# Altium PCB QSTL_RFSW_LED.PcbDoc
Units mm, origin at the board's own origin, x right, y up, seen from the top; angles counter-clockwise.
Board outline 36 x 48 mm, 4 copper layers (Top Layer, L2, L3, Bottom Layer), stack 0.603 mm thick; 9 components, 25 nets, 79 pads, 100 vias.
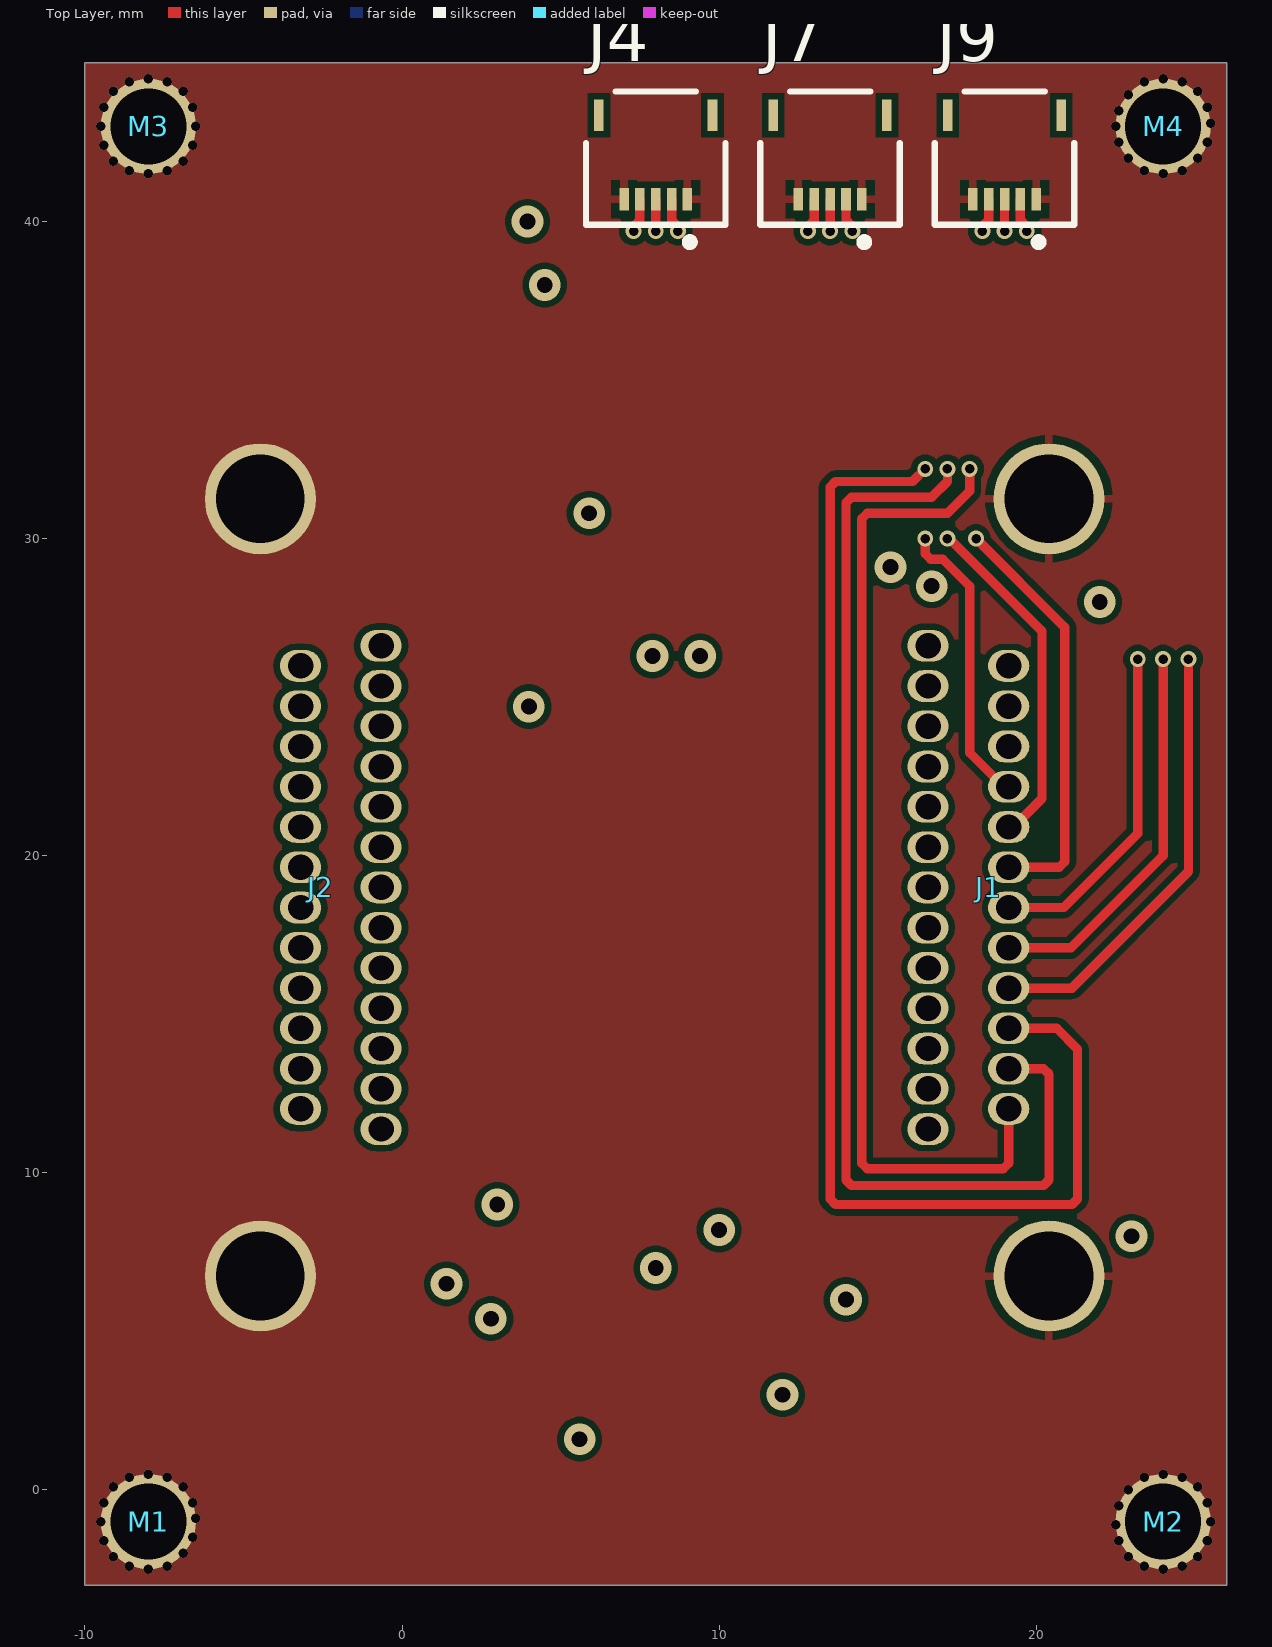
[diagram p0: Top Layer view]
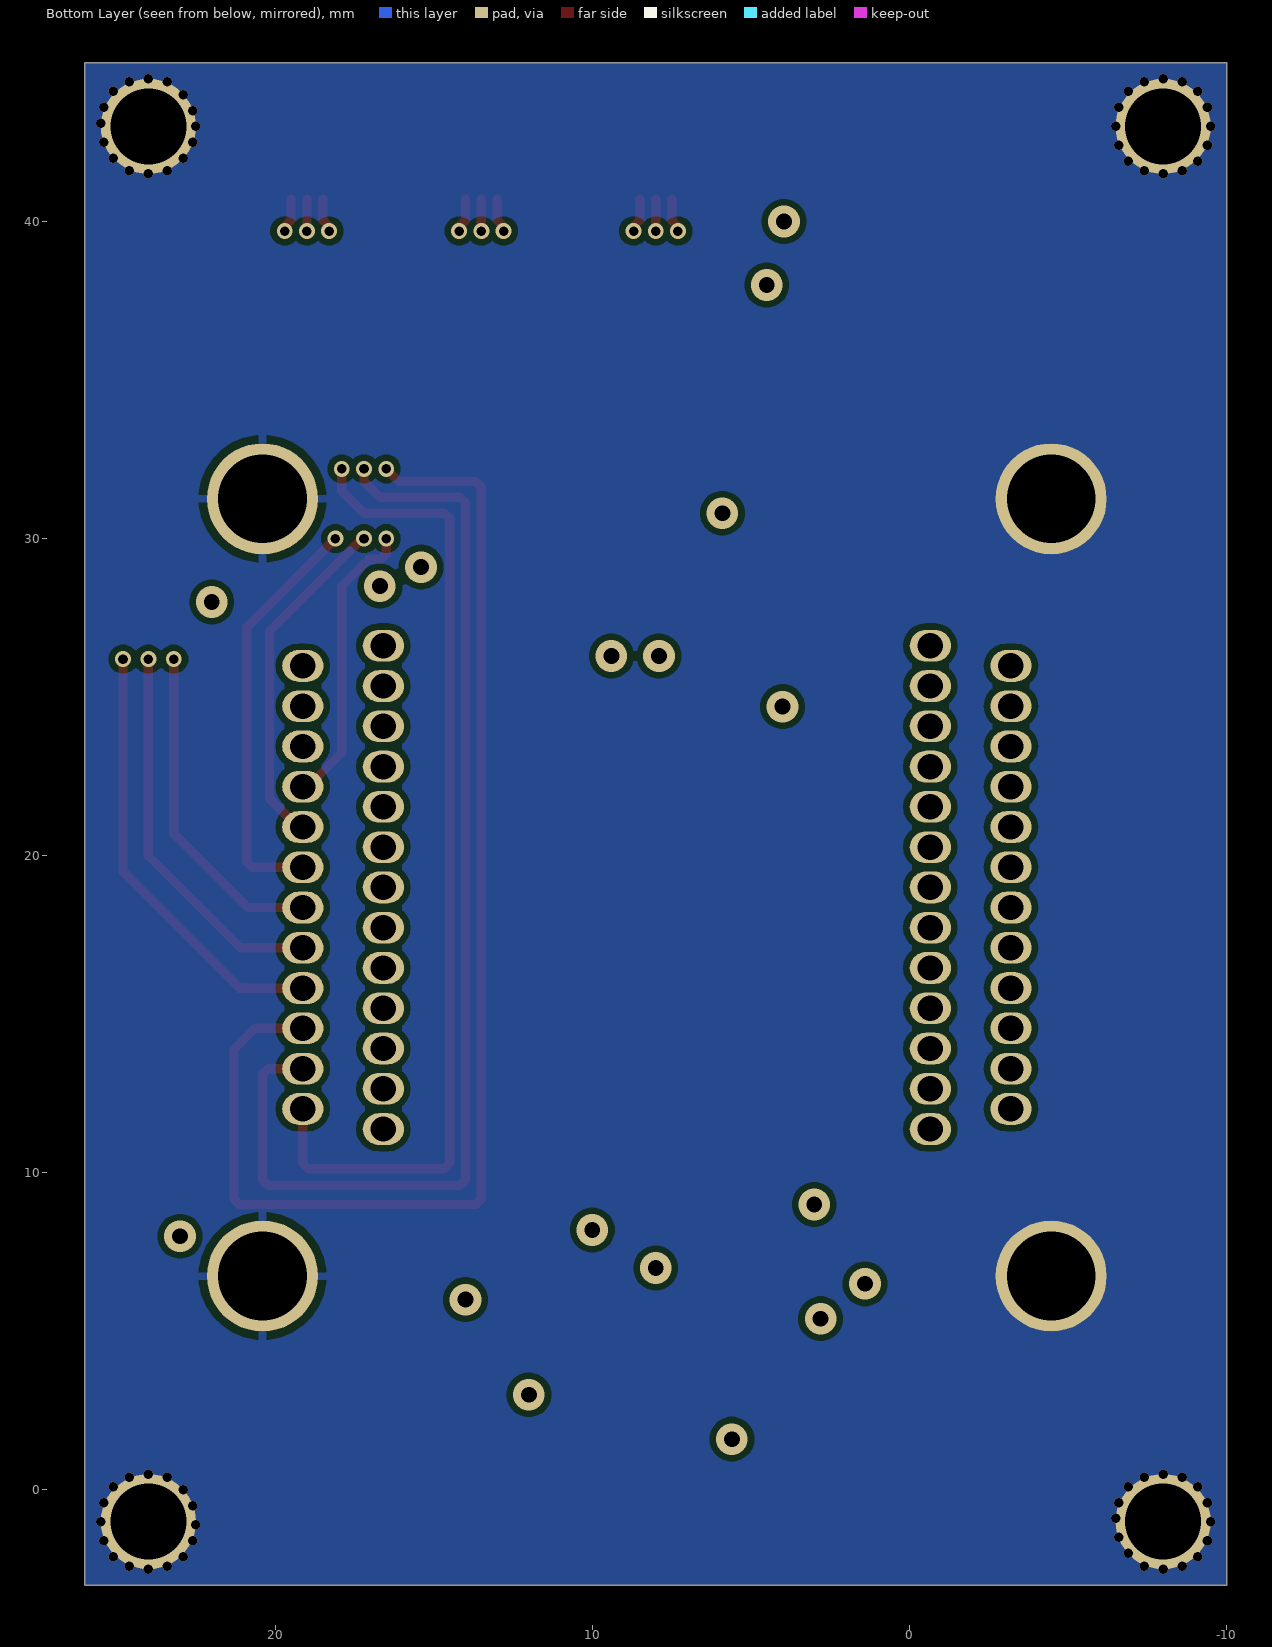
[diagram p1: Bottom Layer view, seen from below]
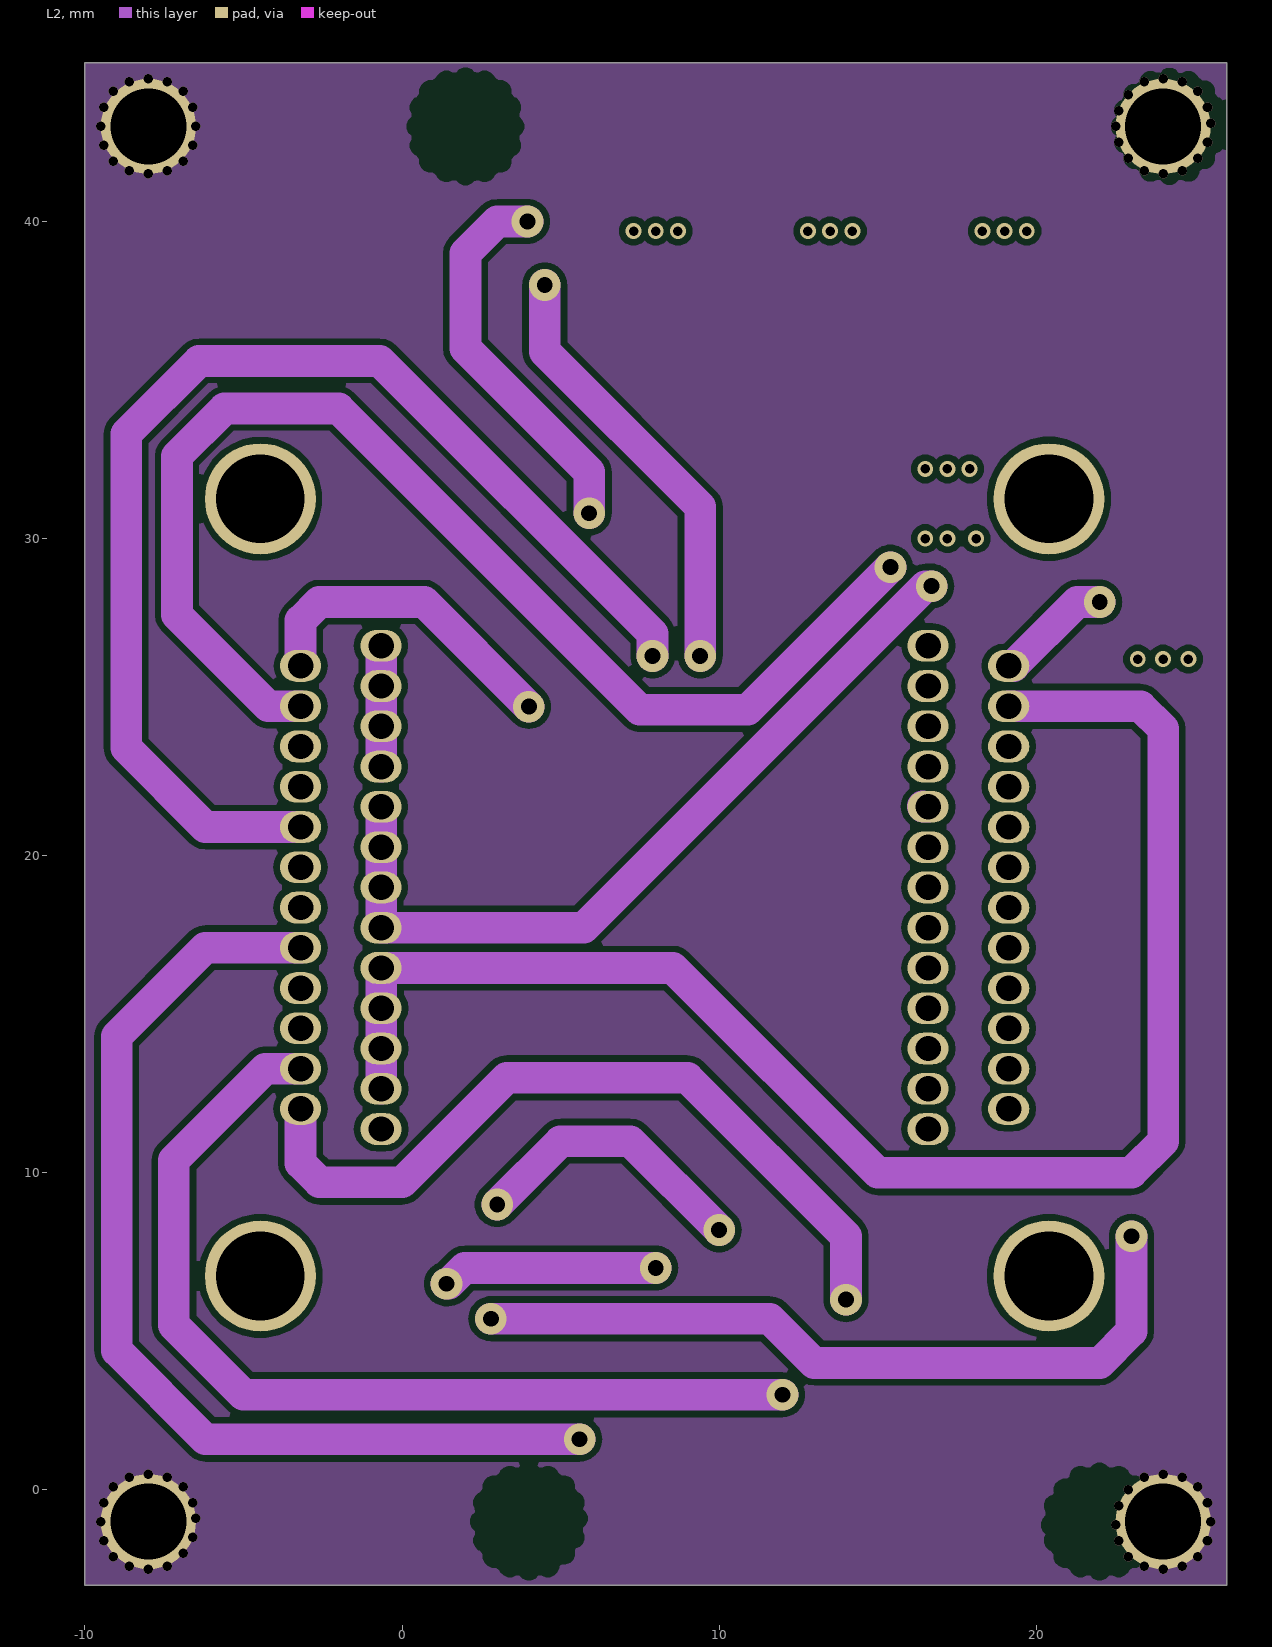
[diagram p2: L2]
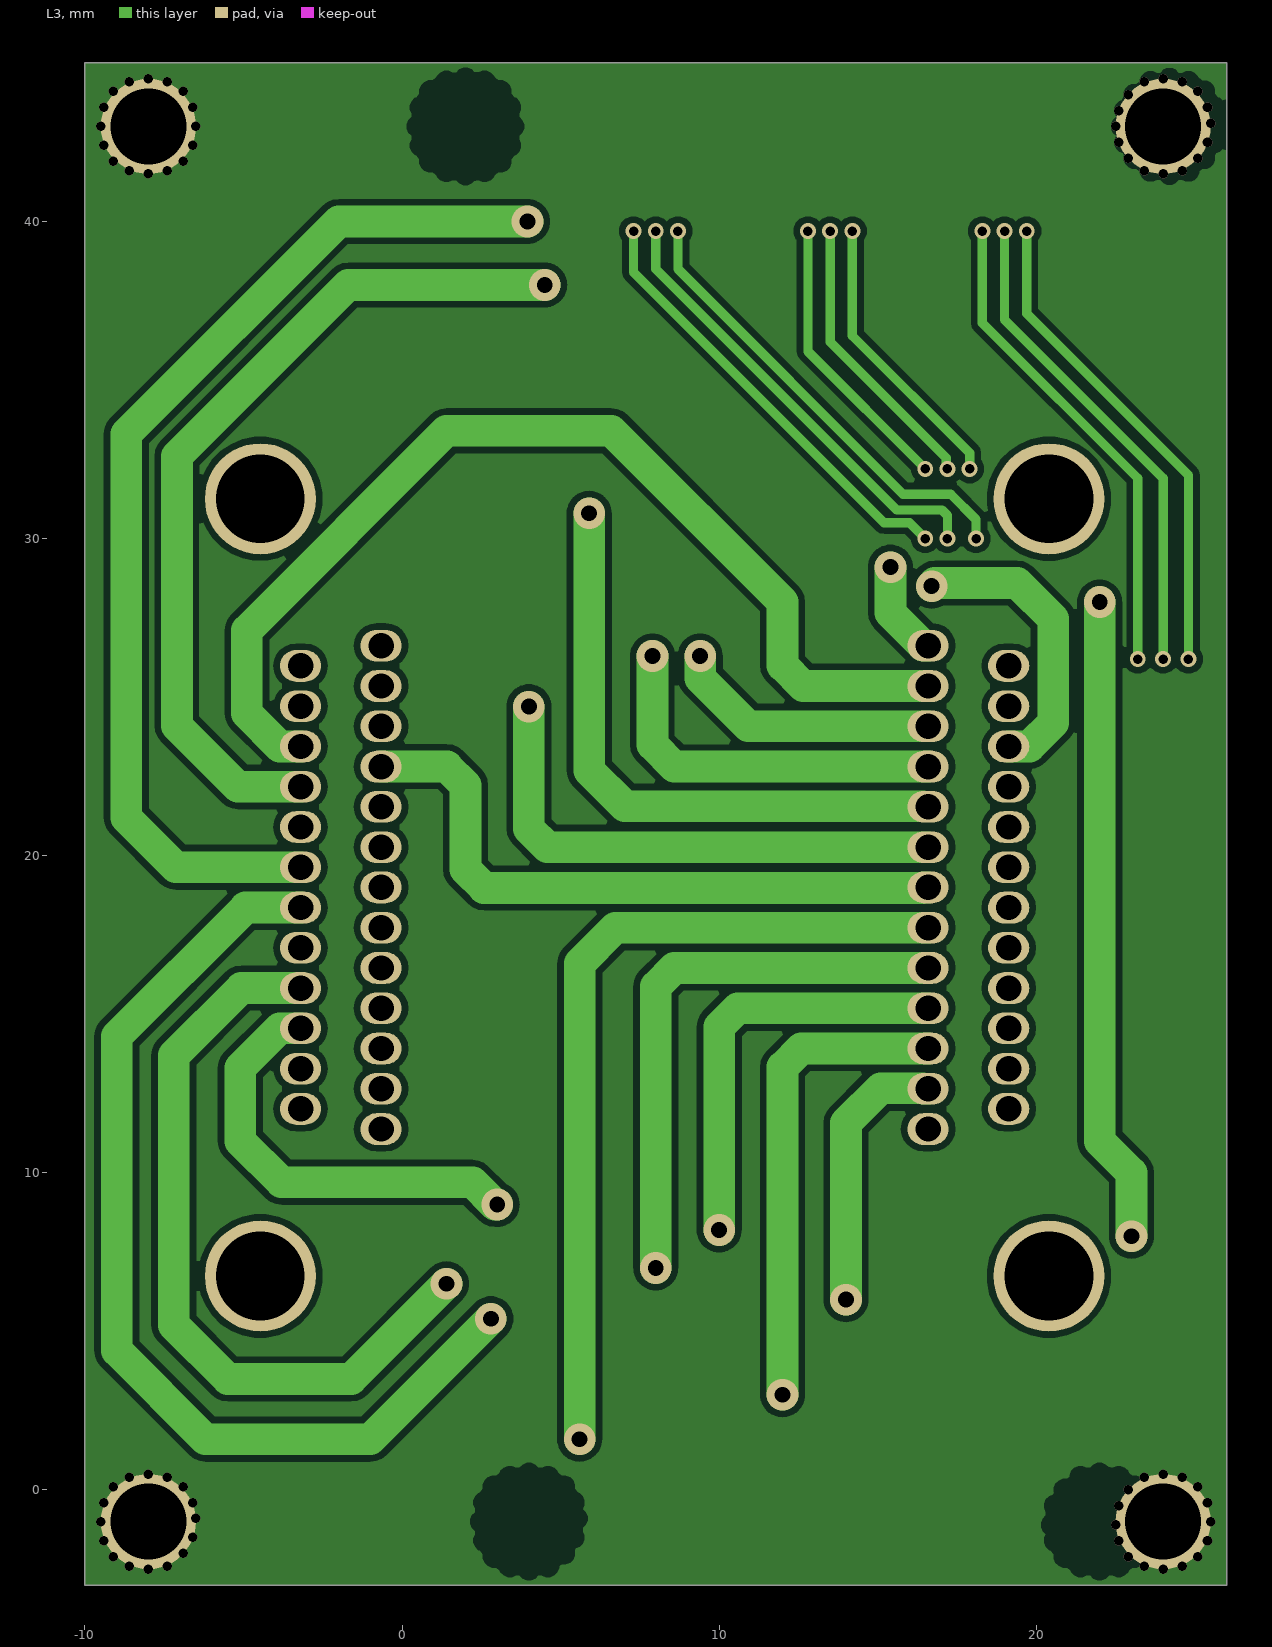
[diagram p3: L3]
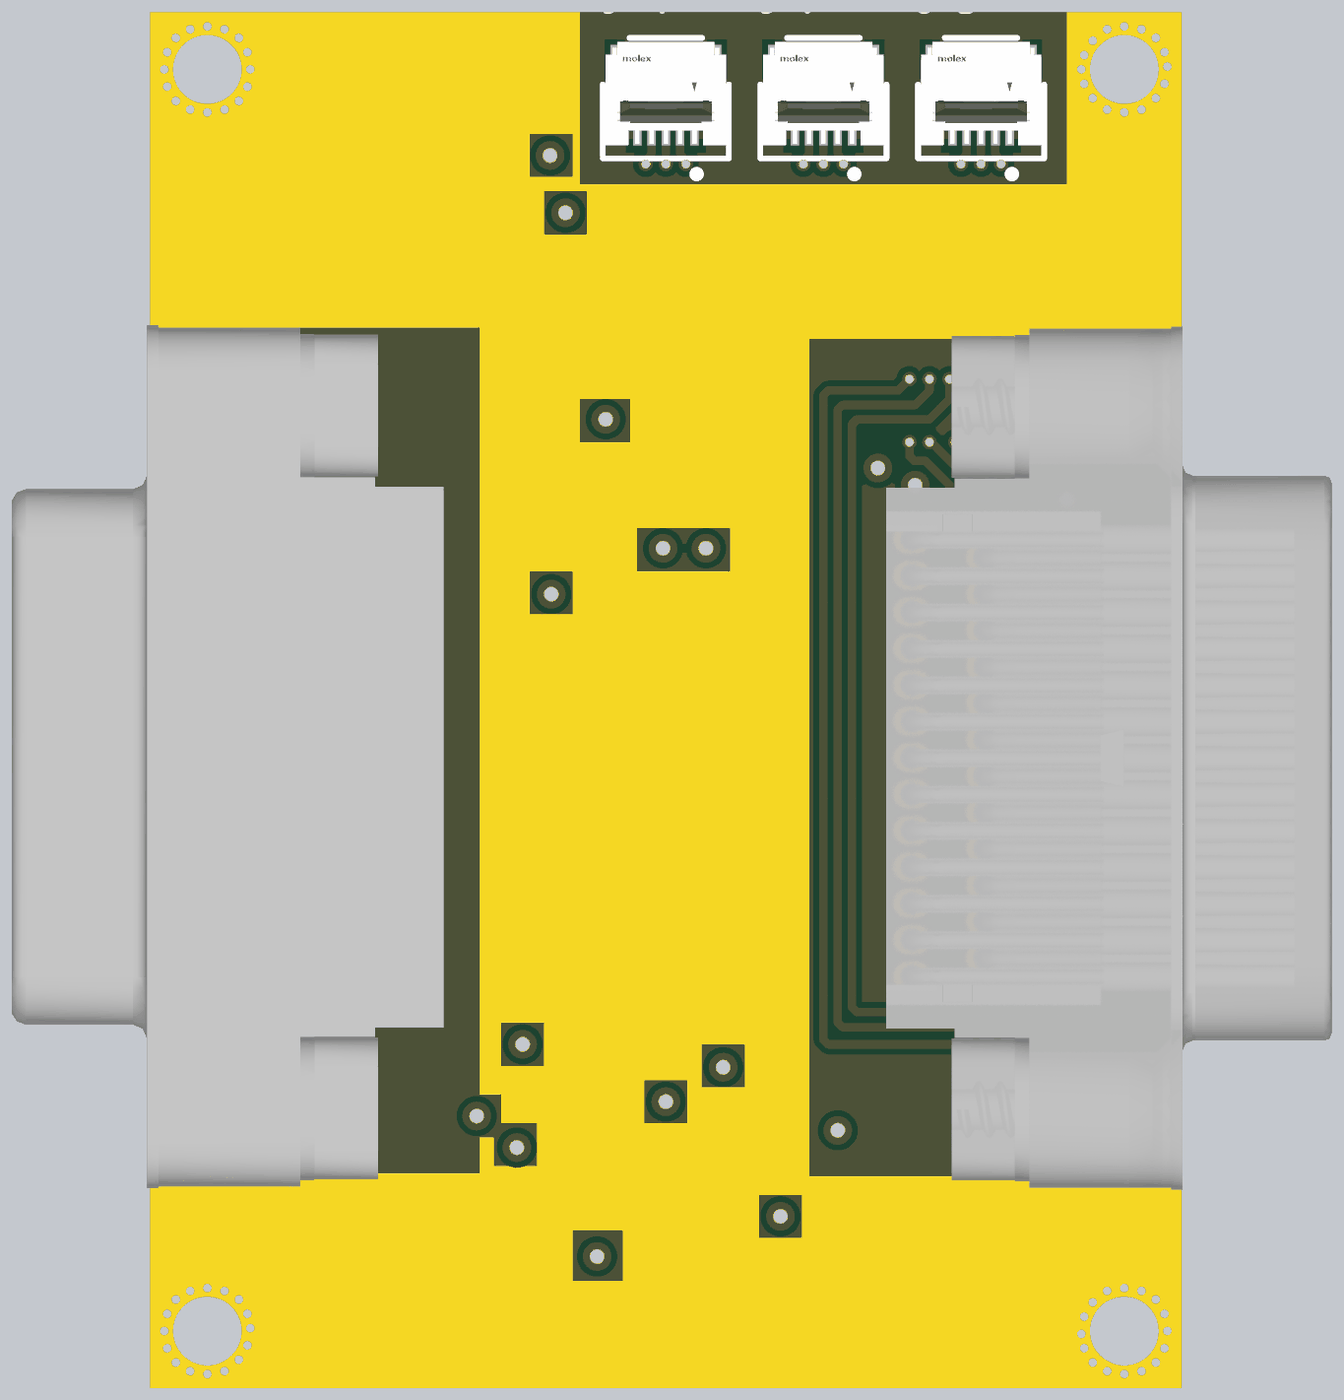
[diagram p4: 3D render of the assembled board from above, using the file's embedded part models]

## Layer stack, top to bottom
Top Solder: solder mask 0.0102, Solder Resist, Dk 3.5
Top Layer: signal copper 0.0356
Dielectric 2: prepreg 0.0711, PP-006, Dk 4.1
L2: signal copper 0.035
Dielectric 1: dielectric 0.32, FR-4, Dk 4.8
L3: signal copper 0.035
Dielectric 3: prepreg 0.0711, PP-006, Dk 4.1
Bottom Layer: signal copper 0.0356
Bottom Solder: solder mask 0.0102, Solder Resist, Dk 3.5

## Board outline
-10,-3 26,-3 26,45 -10,45

## Design rules (kind name [scope] priority, off if disabled: settings)
Clearance [All] p1: gap=0.2 ignorepadtopadclearanceinfootprint=FALSE except(0: Arc-Hole Track-Hole SMDPad-Hole THPad-Hole Via-Hole Fill-Hole Poly-Hole Region-Hole Text-Hole; 0.1: Arc-Arc Arc-Track Track-Track; 0.254: Arc-SMDPad Arc-THPad Arc-Text Track-SMDPad Track-THPad Track-Text SMDPad-SMDPad SMDPad-THPad SMDPad-Text THPad-THPad THPad-Text Via-Text Fill-Text Poly-Text Region-Text Text-Text)
MatchedLengths [1 or 2 or 3 or 4 or 5 or 6 or 7 or 8 or 9 or 10] p1: tolerance=25.4 checknetsindiffpair=FALSE checkdiffpairvsdiffpair=TRUE checkxsignals=TRUE checkothers=TRUE usedelayunits=TRUE delaytolerance=100.000000
PlaneConnect [All] p1: pad.planeconnectstyle=Relief pad.reliefexpansion=0.508 pad.reliefentries=4 pad.reliefconductorwidth=0.254 pad.reliefairgap=0.254 via.planeconnectstyle=Direct via.reliefexpansion=0.508 via.reliefentries=4 via.reliefconductorwidth=0.254 via.reliefairgap=0.254
PolygonConnect [All] p1: thpad.connectstyle=Direct thpad.reliefconductorwidth=0.254 thpad.reliefentries=4 thpad.polygonreliefangle="90 Angle" thpad.airgapwidth=0.254 smdpad.connectstyle=Relief smdpad.reliefconductorwidth=0.254 smdpad.reliefentries=4 smdpad.polygonreliefangle="90 Angle" smdpad.airgapwidth=0.254 via.connectstyle=Direct via.reliefconductorwidth=0.254 via.reliefentries=4 via.polygonreliefangle="90 Angle" via.airgapwidth=0.254
RoutingVias [All] p1: holewidth=0.3 width=0.4 viastyle="Through Hole" minholewidth=0.3 minwidth=0.3 maxholewidth=0.711 maxwidth=1.27
SolderMaskExpansion [All] p1: expansion=0.102 istentingtop=FALSE
SupplyNets "Schematic Supply Nets" [InNet('GND')] p1: voltage=0.000
Width [All] p1: maxlimit=1.5 minlimit=0.254 preferedwidth=1 toplayer_minwidth=0.294 bottomlayer_minwidth=0.294 minimp=50.000000 maximp=50.000000 favimp=50.000000
29 further rules are at their usual default settings.

## Components (designator, comment, footprint, x,y, rotation, side; value= is the part's Value field where it differs from the comment)
J1 "Socket 25 P Micro DSUB" 581-M25-213L461 19.13,19 r90 top locked
J2 "Plug 25 P Micro DSUB" 581-M25-113L461 -3.2,19 r270 top
J4 "503480-0540" FP-503480-0540-MFG 8,42 r180 top locked
J7 "503480-0540" FP-503480-0540-MFG 13.5,42 r180 top locked
J9 "503480-0540" FP-503480-0540-MFG 19,42 r180 top locked
M1 "M2 Hole" M2_Hole -8,-1 r0 top locked
M2 "M2 Hole" M2_Hole 24,-1 r0 top locked
M3 "M2 Hole" M2_Hole -8,43 r0 top
M4 "M2 Hole" M2_Hole 24,43 r0 top locked

## Footprints (in the part's own frame and the unit in brackets; to place one, negate y for a bottom-side part, rotate by r counter-clockwise, add the part's x,y. Pads: shape width x height; smd on the part's side, far side on the other; paste and mask are expansions set on the pad)
581-M25-113L461 [mm]
  oval 1x1.3 hole 0.8: 1(-7.62,2.54) 2(-6.35,2.54) 3(-5.08,2.54) 4(-3.81,2.54) 5(-2.54,2.54) 6(-1.27,2.54) 7(0,2.54) 8(1.27,2.54) 9(2.54,2.54) 10(3.81,2.54) 11(5.08,2.54) 12(6.35,2.54) 13(7.62,2.54) 14(-6.985,0) 15(-5.715,0) 16(-4.445,0) 17(-3.175,0) 18(-1.905,0) 19(-0.635,0) 20(0.635,0) 21(1.905,0) 22(3.175,0) 23(4.445,0) 24(5.715,0) 25(6.985,0)
  round 3.5 hole 2.8: 26(-12.255,-1.27) 27(12.255,-1.27)
  body extent -15.08,-11.62 15.02,3.45, height 7.9
581-M25-213L461 [mm]
  oval 1x1.3 hole 0.8: 1(7.62,2.54) 2(6.35,2.54) 3(5.08,2.54) 4(3.81,2.54) 5(2.54,2.54) 6(1.27,2.54) 7(0,2.54) 8(-1.27,2.54) 9(-2.54,2.54) 10(-3.81,2.54) 11(-5.08,2.54) 12(-6.35,2.54) 13(-7.62,2.54) 14(6.985,0) 15(5.715,0) 16(4.445,0) 17(3.175,0) 18(1.905,0) 19(0.635,0) 20(-0.635,0) 21(-1.905,0) 22(-3.175,0) 23(-4.445,0) 24(-5.715,0) 25(-6.985,0)
  round 3.5 hole 2.8: 26(-12.255,-1.27) 27(12.255,-1.27)
  body extent -15.07,-12.1 15.03,3.45, height 8.4
FP-503480-0540-MFG [mm]
  rect 0.3x0.7 smd paste+0 mask+0: 1(-1,1.3) 2(-0.5,1.3) 3(0,1.3) 4(0.5,1.3) 5(1,1.3)
  rect 0.3x1 smd paste+0 mask+0: 6(-1.79,-1.35) 7(1.79,-1.35)
  silkscreen extent -2.2,-2.1 2.2,2.77, body extent -2.3,-2.2 2.3,2.2, height 0.25
M2_Hole [mm]
  round 3 hole 2.4: 1(0,0)

## Part data
J1: library part 581-M25-213L461
J2: library part 581-M25-113L461
J4 J7 J9: library part CMP-00257-52963780-1, "503480-0540 Connector FFC/FPC SKT 5 Position 0.5mm Solder Right Angle Surface Mount T/R", Current Rating=500mA, Flammability Rating="UL94 V-0", Manufacturer Lifecycle Status=ACTIVE, Max Operating Temperature=85°C, Min Operating Temperature=-40°C, Voltage Rating=50V, Actuator Material="Glass, Nylon, Polyamide", Contact Material="Bronze, Gold, Nickel", Contact Plating=Gold, Country of Origin=KR, Halogen Free="Low Halogen", Height=2.07mm, Housing Material=Polymer, Lifecycle Status=Production, Mount="Surface Mount", NexarPartId=52963780, Number of Circuits=5, Number of Contacts=5, Number of Positions=5, Number of Rows=1, Orientation="Right Angle", Pitch=508µm, Plating=Gold, RoHS=Compliant, Termination=Solder, Wire/Cable Type=Straight
M1 M2 M3 M4: library part M2_HOLE

## Via types
v1: diameter 0.3, hole 0.3, Top Layer to Bottom Layer, tented both sides, 64 vias
v2: diameter 0.5, hole 0.3, Top Layer to Bottom Layer, tented both sides, 18 vias
v3: diameter 1, hole 0.5, Top Layer to Bottom Layer, tented both sides, 18 vias

## Nets (pads, with @x,y where several pads share a name; then routed paths per layer and width w, separated by ;. In a path a pad name is that pad's centre, name@x,y a point inside that pad or via, vN(x,y) a via of type N, cw(c..) or ccw(c..) an arc to the next point about the centre after c; other vN are vias at no path point)
1: J1.1 J2.15 | length 42.1
  L2 w1: J2.15 -4.215,24.715 -7.1,27.6 -7.1,32.6 -5.6,34.1 -2,34.1 7.5,24.6 10.9,24.6 v3(15.4,29.1)
  L3 w1: v3(15.4,29.1) 15.4,27.66 16.44,26.62 J1.1
2: J1.2 J2.16 | length 33.3
  L3 w1: J2.16 -3.853,23.445 -4.9,24.492 -4.9,27.1 1.4,33.4 6.6,33.4 12,28 12,26 12.65,25.35 J1.2
3: J1.3 J2.17 | length 49.3
  L2 w1: v3(4.499,38) 4.499,35.901 9.4,31 v3(9.4,26.3)
  L3 w1: J2.17 -5.175,22.175 -7.1,24.1 -7.1,32.6 -1.7,38 v3(4.499,38) ; v3(9.4,26.3) 9.4,25.6 10.92,24.08 J1.3
4: J1.4 J2.18 | length 50
  L2 w1: J2.18 -6.205,20.905 -8.7,23.4 -8.7,33.3 -6.4,35.6 -0.7,35.6 7.9,27 v3(7.9,26.3)
  L3 w1: v3(7.9,26.3) 7.9,23.496 8.586,22.81 J1.4
5: J1.5 J2.19 | length 65.1
  L2 w1: v3(3.958,40) 3,40 2,39 2,36 5.9,32.1 v3(5.9,30.8) ; J1.5@16.424,21.556 16.44,21.54 J1.5
  L3 w1: J2.19 -7.135,19.635 -8.7,21.2 -8.7,33.3 -2,40 v3(3.958,40) ; v3(5.9,30.8) 5.9,22.686 7.03,21.556 J1.5@16.424,21.556
6: J1.6 J2.14 | length 26.9
  L2 w1: J2.14 -3.2,27.414 -2.614,28 0.7,28 v3(4,24.7)
  L3 w1: v3(4,24.7) 4,20.856 4.586,20.27 J1.6
7: J1.7 J2.1 J2.2 J2.3 J2.4 | length 24.2
  L2 w1: J2.4 J2.3 J2.2 J2.1
  L3 w1: J2.4 1.414,22.81 2,22.224 2,19.57 2.586,18.984 16.424,18.984 16.44,19 J1.7
8: J1.8 J2.21 | length 59.1
  L2 w1: J2.21 -6.205,17.095 -9,14.3 -9,4.4 -6.2,1.6 v3(5.6,1.6)
  L3 w1: v3(5.6,1.6) 5.6,16.6 6.73,17.73 J1.8
9: J1.9 J2.22 | length 48.4
  L2 w1: v3(1.4,6.5) 1.473,6.5 1.973,7 v3(8,7)
  L3 w1: J2.22 -5.075,15.825 -7.2,13.7 -7.2,5.2 -5.5,3.5 -1.6,3.5 v3(1.4,6.5) ; v3(8,7) 8,15.874 8.586,16.46 J1.9
10: J1.10 J2.23 | length 35.9
  L2 w1: v3(3,9) 5,11 7.2,11 v3(10,8.2)
  L3 w1: J2.23 -3.853,14.555 -5.1,13.308 -5.1,11 -3.8,9.7 2.227,9.7 2.927,9 v3(3,9) ; v3(10,8.2) 10,14.604 10.586,15.19 J1.10
11: J1.11 J2.24 | length 45.7
  L2 w1: J2.24 -4.315,13.285 -7.2,10.4 -7.2,5.2 -5,3 v3(12,3)
  L3 w1: v3(12,3) 12,13.334 12.586,13.92 J1.11
12: J1.12 J2.25 | length 33.2
  L2 w1: J2.25 -3.2,10.3 -2.6,9.7 0,9.7 3.3,13 9,13 14,8 v3(14,6)
  L3 w1: v3(14,6) 14,11.574 15.092,12.666 16.424,12.666 16.44,12.65 J1.12
14: J1.14 J2.20 | length 80.2
  L2 w1: v3(2.8,5.4) 11.6,5.4 13,4 22,4 23,5 v3(23,8) ; J1.14 19.28,25.985 21.295,28 v3(22,28)
  L3 w1: J2.20 -4.935,18.365 -9,14.3 -9,4.4 -6.2,1.6 -1,1.6 v3(2.8,5.4) ; v3(22,28) 22,11 23,10 v3(23,8)
15: J1.15 J2.9 J2.10 J2.11 J2.12 | length 49.7
  L2 w1: J2.12 J2.11 J2.10 J2.9 8.54,16.46 15,10 23,10 24,11 24,24 23.285,24.715 J1.15
16: J1.16 J2.5 J2.6 J2.7 J2.8 | length 35
  L2 w1: J2.5 J2.6 J2.7 J2.8 5.727,17.73 16.497,28.5 v3(16.7,28.5)
  L3 w1: v3(16.7,28.5) 16.8,28.6 19.4,28.6 20.534,27.466 20.534,24.196 19.783,23.445 J1.16
17: J1.17 J4.4 | length 24.3
  Top Layer w0.294: v2(7.3,39.7) 7.339,39.739 7.339,39.884 7.5,40.044 J4.4 ; v2(16.5,30) 16.5,29.519 16.672,29.347 17.051,29.347 17.9,28.498 17.9,23.251 18.976,22.175 J1.17
  L3 w0.294: v2(7.3,39.7) 7.3,38.4 15.2,30.5 16,30.5 v2(16.5,30)
18: J1.18 J4.3 | length 26.2
  Top Layer w0.294: v2(8,39.7) J4.3 ; v2(17.2,30) 17.256,30 20.181,27.075 20.181,21.802 19.284,20.905 J1.18
  L3 w0.294: v2(8,39.7) 8,38.5 15.6,30.9 17.028,30.9 17.2,30.728 v2(17.2,30)
19: J1.19 J4.2 | length 28.7
  Top Layer w0.294: J4.2 8.5,40.044 8.661,39.884 8.661,39.739 v2(8.7,39.7) ; v2(18.1,30) 20.9,27.2 20.9,19.807 20.728,19.635 J1.19
  L3 w0.294: v2(8.7,39.7) 8.7,38.5 15.8,31.4 17.3,31.4 18.1,30.6 v2(18.1,30)
20: J1.20 J9.4 | length 27.1
  Top Layer w0.294: v2(18.3,39.7) 18.339,39.739 18.339,39.884 18.5,40.044 J9.4 ; J1.20 20.865,18.365 23.2,20.7 v2(23.2,26.2)
  L3 w0.294: v2(18.3,39.7) 18.3,36.8 23.2,31.9 v2(23.2,26.2)
21: J1.21 J9.3 | length 28.8
  Top Layer w0.294: v2(19,39.7) J9.3 ; J1.21 21.095,17.095 24,20 v2(24,26.2)
  L3 w0.294: v2(19,39.7) 19,36.9 24,31.9 v2(24,26.2)
22: J1.22 J9.2 | length 30.6
  Top Layer w0.294: J1.22 21.125,15.825 24.8,19.5 v2(24.8,26.2) ; J9.2 19.5,40.044 19.661,39.884 19.661,39.739 v2(19.7,39.7)
  L3 w0.294: v2(19.7,39.7) 19.7,37.1 24.8,32 v2(24.8,26.2)
23: J1.23 J7.4 | length 50.9
  Top Layer w0.294: v2(12.8,39.7) 12.839,39.739 12.839,39.884 13,40.044 J7.4 ; v2(16.5,32.2) 16.1,31.8 13.672,31.8 13.5,31.628 13.5,9.172 13.672,9 21.128,9 21.3,9.172 21.3,13.9 20.645,14.555 J1.23
  L3 w0.294: v2(12.8,39.7) 12.8,35.9 v2(16.5,32.2)
24: J1.24 J7.3 | length 46.5
  Top Layer w0.294: v2(13.5,39.7) J7.3 ; v2(17.2,32.2) 17.2,31.8 16.7,31.3 14.172,31.3 14,31.128 14,9.772 14.172,9.6 20.228,9.6 20.4,9.772 20.4,13.113 20.228,13.285 J1.24
  L3 w0.294: v2(13.5,39.7) 13.5,36.2 17.161,32.539 17.161,32.239 v2(17.2,32.2)
25: J1.25 J7.2 | length 41.4
  Top Layer w0.294: J7.2 14,40.044 14.161,39.884 14.161,39.739 v2(14.2,39.7) ; v2(17.9,32.2) 17.9,31.5 17.2,30.8 14.672,30.8 14.5,30.628 14.5,10.302 14.672,10.13 18.958,10.13 19.13,10.302 J1.25
  L3 w0.294: v2(14.2,39.7) 14.2,36.4 17.9,32.7 v2(17.9,32.2)
GND: J1.26 J1.27 J2.26 J2.27 J4.1 J4.5 J7.1 J7.5 J9.1 J9.5 M1.1 M2.1 M3.1 M4.1
  other v1: -8,-2.5 24,-2.5 -8.6,-2.4 -7.4,-2.4 23.4,-2.4 24.6,-2.4 -9.1,-2.1 22.9,-2.1 25.1,-2.1 -6.9,-2 -9.4,-1.6 22.6,-1.6 25.4,-1.6 -6.6,-1.5 22.5,-1.1 -9.5,-1 25.5,-1 -6.5,-0.9 22.6,-0.5 -9.4,-0.4 -6.6,-0.4 25.4,-0.4 22.9,0 -9.1,0.1 -6.9,0.1 25.1,0.1 -8.6,0.4 -7.4,0.4 23.4,0.4 24.6,0.4 -8,0.5 24,0.5 -8,41.5 24,41.5 -8.6,41.6 -7.4,41.6 23.4,41.6 24.6,41.6 -9.1,41.9 -6.9,41.9 22.9,42 25.1,42 -9.4,42.4 -6.6,42.4 22.6,42.5 25.4,42.5 -9.5,43 -6.5,43 22.5,43 25.5,43.1 22.6,43.5 -9.4,43.6 -6.6,43.6 25.4,43.6 22.9,44 -9.1,44.1 -6.9,44.1 25.1,44.1 -8.6,44.4 -7.4,44.4 23.4,44.4 24.6,44.4 -8,44.5 24,44.5
pads on no net: J1.13 J2.13 J4.6 J4.7 J7.6 J7.7 J9.6 J9.7

## Polygon pours and split planes (outlines as drawn)
GND on Top Layer "GND_L01_P-001" (solid, pour order 0): -10,45 -10,-3 26,-3 26,45
no net on Top Solder "GND_L01_P-001" (solid): -10,45 26,45 26,-3 -10,-3
no net on Bottom Solder "GND_L01_P-001" (solid): -10.043,44.915 -10.043,-2.957 -10,-3 26,-3 26,45 -10,45
GND on Bottom Layer "GND_L01_P-001" (solid, pour order 1): -10,45 -10,-3 26,-3 26,45
no net on L3 "GND_L01_P-001" (solid, pour order 2): -10,45 -10,-3 26,-3 26,45
no net on L2 "GND_L01_P-001" (solid, pour order 3): -10,45 -10,-3 26,-3 26,45

## Silkscreen, mask and mechanical layers (free items; w line width, h text height)
Top Solder:
  pour cut-out: 11.25,3.75 11.25,2.25 12.75,2.25 12.75,3.75
  pour cut-out: 4.75,2.5 4.75,0.75 6.5,0.75 6.5,2.5
  pour cut-out: 9.25,9 9.25,7.5 10.75,7.5 10.75,9
  pour cut-out: 7.25,7.75 7.25,6.25 8.75,6.25 8.75,7.75
  pour cut-out: 0.75,5.75 0.75,7.25 2.25,7.25 2.25,5.75
  pour cut-out: 2,4.75 3.5,4.75 3.5,6.25 2,6.25
  pour cut-out: 2.25,9.75 2.25,8.25 3.75,8.25 3.75,9.75
  pour cut-out: -10,34 1.5,34 1.5,4.5 -10,4.5
  pour cut-out: 3.75,38.75 3.75,37.25 5.25,37.25 5.25,38.75
  pour cut-out: 3.25,40.75 3.25,39.25 4.75,39.25 4.75,40.75
  pour cut-out: 5,45 5,39 22,39 22,45
  pour cut-out: 5,31.5 5,30 6.75,30 6.75,31.5
  pour cut-out: 7,27 7,25.5 10.25,25.5 10.25,27
  pour cut-out: 3.25,25.5 3.25,24 4.75,24 4.75,25.5
  pour cut-out: 13,4.4 26,4.4 26,33.6 13,33.6
Bottom Solder:
  pour cut-out: 16,31.75 18.25,31.75 18.25,32.75 16,32.75
  pour cut-out: 16,30.5 16,29.5 18.5,29.5 18.5,30.5
  pour cut-out: 14.75,29.75 16,29.75 16,28.5 14.75,28.5
  pour cut-out: 16,29.25 17.25,29.25 17.25,28 16,28
  pour cut-out: 3.25,39.25 4.75,39.25 4.75,40.75 3.25,40.75
  pour cut-out: 3.75,37.25 5.25,37.25 5.25,38.75 3.75,38.75
  pour cut-out: 5,30 6.75,30 6.75,31.5 5,31.5
  pour cut-out: 7,25.5 10.25,25.5 10.25,27 7,27
  pour cut-out: 3.25,24 4.75,24 4.75,25.5 3.25,25.5
  pour cut-out: 17.75,39.25 20.25,39.25 20.25,40.25 17.75,40.25
  pour cut-out: 12.25,39.25 14.75,39.25 14.75,40.25 12.25,40.25
  pour cut-out: 6.75,39.25 9.25,39.25 9.25,40.25 6.75,40.25
  pour cut-out: 21.25,27.25 22.75,27.25 22.75,28.75 21.25,28.75
  pour cut-out: 22.75,25.75 25.25,25.75 25.25,26.75 22.75,26.75
  pour cut-out: 22.25,7.25 23.75,7.25 23.75,8.75 22.25,8.75
  pour cut-out: 13.25,5.25 14.75,5.25 14.75,6.75 13.25,6.75
  pour cut-out: 11.25,4 11.25,2.25 12.75,2.25 12.75,4
  pour cut-out: 4.75,0.75 6.5,0.75 6.5,2.5 4.75,2.5
  pour cut-out: 9.25,9 9.25,7.5 10.75,7.5 10.75,9
  pour cut-out: 7.25,6.25 8.75,6.25 8.75,7.75 7.25,7.75
  pour cut-out: 2.25,8.25 3.75,8.25 3.75,9.75 2.25,9.75
  pour cut-out: 2,4.75 3.5,4.75 3.5,6.25 2,6.25
  pour cut-out: 0.75,7.25 0.75,5.75 2.25,5.75 2.25,7.25
  pour cut-out: -5,28 -5,10 1,10 1,28
  pour cut-out: 15,10 21,10 21,28 15,28
Mechanical 1:
  the board outline again, w0.254